# EAGLE board kingoftone_v1 (EAGLE 6.5.0)
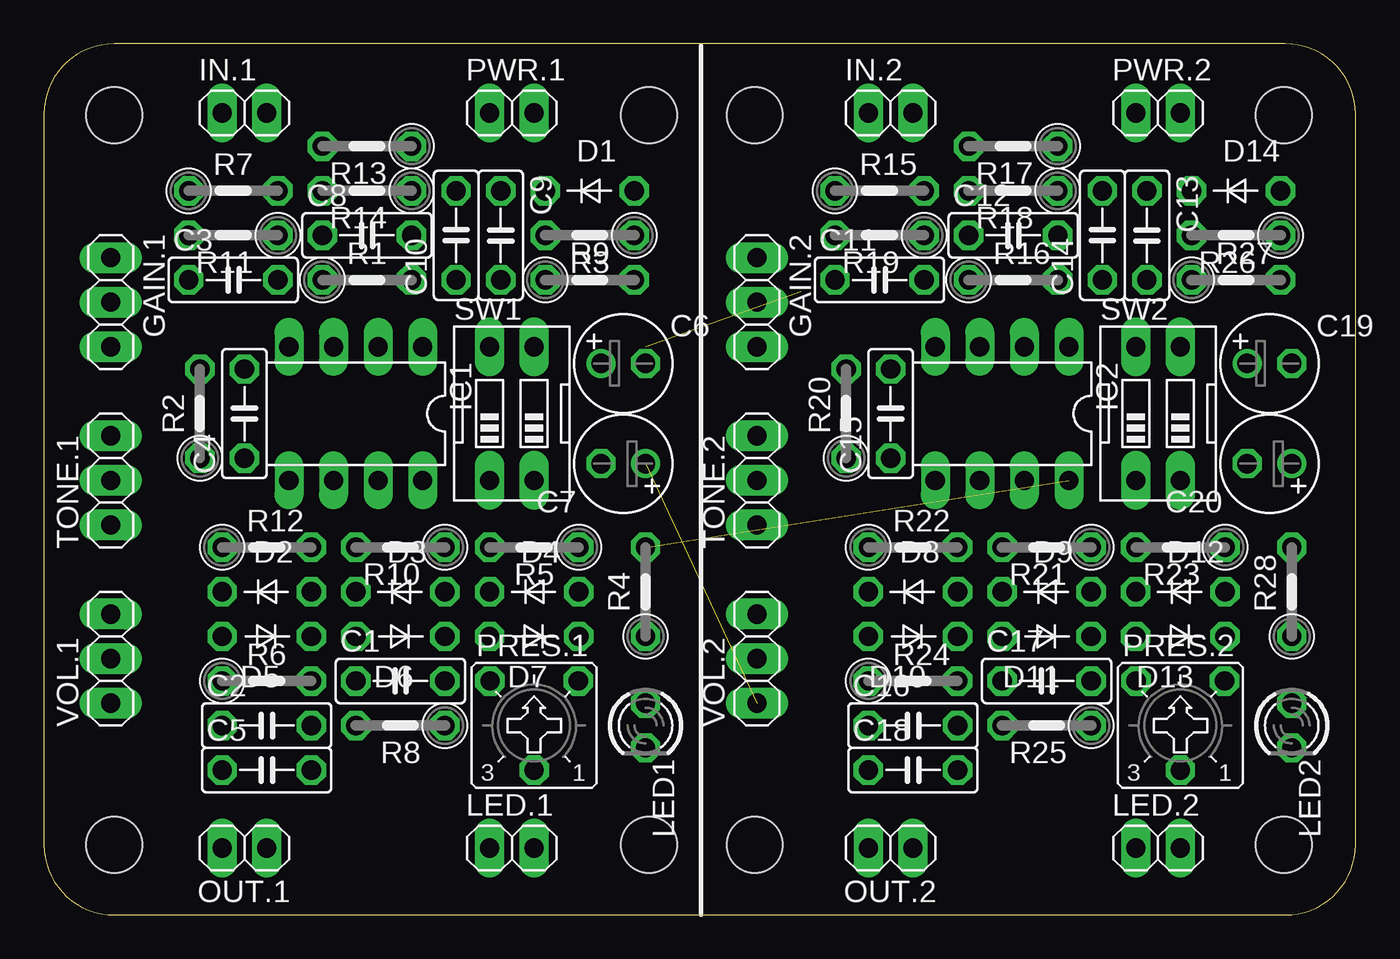
[diagram p0: board, top side]
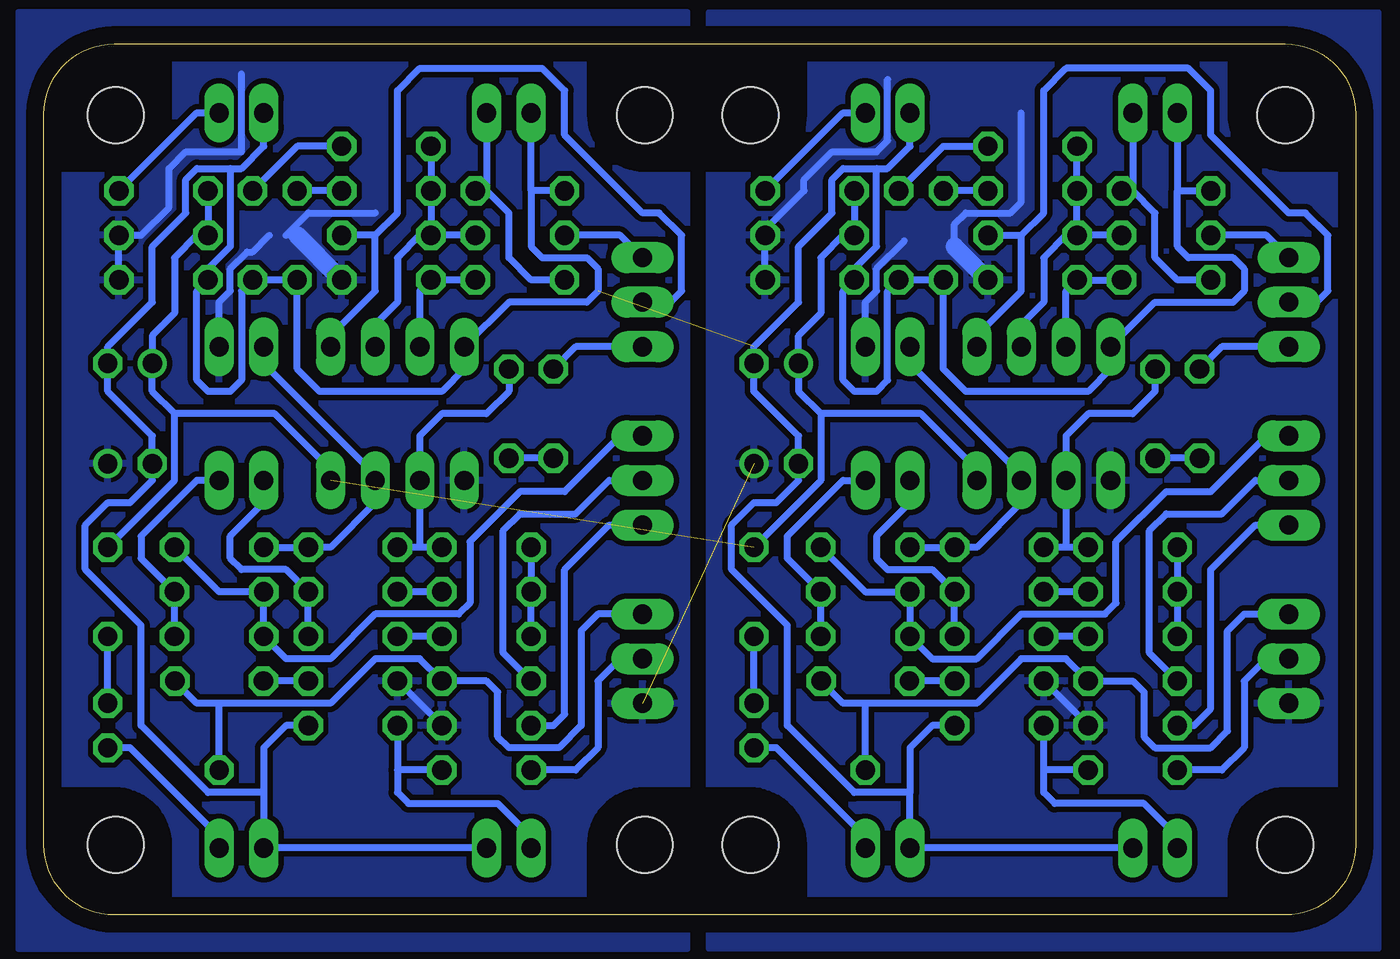
[diagram p1: board, bottom side, seen from below]

Size 74.76 x 49.65 mm. Coordinates in mm from the lower left corner, seen from the top.
Outline: 4,0 70.76,0 arc90 74.76,4 74.76,45.65 arc90 70.76,49.65 4,49.65 arc90 0,45.65 0,4 arc90 4,0
Copper layers (1*16): Top 0.035mm / dielectric 1.5mm / Bottom 0.035mm
Design rules "default": minimum track width 10mil, minimum drill 24mil, track to track 8mil, track to pad 8mil, pad to pad 8mil, via to via 8mil, smd to smd 8mil, copper to edge 40mil, drill to drill 8mil, minimum pad ring 10mil, minimum via ring 8mil, stop-mask expansion 4mil, vias tented up to drill 0mil, thermal gap 10mil
Holes 3.2 mm at 4,4 70.67,4 70.67,45.59 4,45.59 34.48,45.59 34.48,4 40.51,4 40.51,45.59
tKeepout: 8 lines
tRestrict: area 0,42.6 to 7,49.6; area 67.8,42.6 to 74.8,49.6; area 0,0 to 7,7; area 67.8,0 to 74.8,7; area 31.6,42.6 to 37,49.6; area 31.6,0 to 37.3,7; area 36.5,0 to 43.5,7; area 36.5,42.6 to 43.5,49.6
bRestrict: area 0,42.6 to 7,49.6; area 67.8,42.6 to 74.8,49.6; area 0,0 to 7,7; area 67.8,0 to 74.8,7; area 31.6,42.6 to 37,49.6; area 31.6,0 to 37.3,7; area 36.5,0 to 43.5,7; area 36.5,42.6 to 43.5,49.6
vRestrict: area 0,42.6 to 7,49.6; area 67.8,42.6 to 74.8,49.6; area 0,0 to 7,7; area 67.8,0 to 74.8,7; area 31.6,42.6 to 37,49.6; area 31.6,0 to 37.3,7; area 36.5,0 to 43.5,7; area 36.5,42.6 to 43.5,49.6

## Footprints (pad centres in the part's own frame; a part is rotated, then mirrored left to right if it is on the bottom)
C050-025X075 = drill 1.1 pad 1.676 octagon: 1 -2.54,0; 2 2.54,0
E2,5-6 = drill 1.1: + -1.27,0 | drill 1.1 pad 1.6 octagon: - 1.27,0
DO41-5 = drill 1.1 pad 1.676 octagon: A 2.54,0; C -2.54,0
1X03 = drill 1.1 pad 1.778 long: 1 -2.54,0; 2 0,0; 3 2.54,0
DIL08 = drill 1.1 long: 1 -3.81,-3.81; 2 -1.27,-3.81; 3 1.27,-3.81; 4 3.81,-3.81; 5 3.81,3.81; 6 1.27,3.81; 7 -1.27,3.81; 8 -3.81,3.81
1X02 = drill 1.1 pad 1.676 long: 1 -1.27,0; 2 1.27,0
LED3MM = drill 1.1 octagon: A -1.27,0; K 1.27,0
CT6 = drill 1.1 pad 1.676 octagon: A 2.515,2.54; E -2.515,2.54; S 0,-2.54
0207/5V = drill 1.1 pad 1.676 octagon: 1 -2.54,0; 2 2.54,0
EDG-02 = drill 1.1 pad 1.676 long: 1 -1.27,-3.81; 2 1.27,-3.81; 3 1.27,3.81; 4 -1.27,3.81

## Placement (x,y rotation side)
C1  10nF  [C050-025X075]  20.32,13.34 0 top
C2  10nF  [C050-025X075]  12.7,10.79 0 top
C3  10nF  [C050-025X075]  10.79,36.2 0 top
C4  100nF  [C050-025X075]  11.43,28.57 90 top
C5  1uF  [C050-025X075]  12.7,8.26 0 top
C6  100uF  [E2,5-6]  33.02,31.43 0 top
C7  100uF  [E2,5-6]  33.02,25.72 180 top
C8  100pF  [C050-025X075]  18.41,38.73 0 top
C9  10nF  [C050-025X075]  26.04,38.73 270 top
C10  10nF  [C050-025X075]  23.5,38.73 90 top
C11  10nF  [C050-025X075]  47.62,36.2 0 top
C12  100pF  [C050-025X075]  55.24,38.73 0 top
C13  10nF  [C050-025X075]  62.87,38.73 270 top
C14  10nF  [C050-025X075]  60.33,38.73 90 top
C15  100nF  [C050-025X075]  48.26,28.57 90 top
C16  10nF  [C050-025X075]  49.53,10.79 0 top
C17  10nF  [C050-025X075]  57.15,13.34 0 top
C18  1uF  [C050-025X075]  49.53,8.26 0 top
C19  100uF  [E2,5-6]  69.85,31.43 0 top
C20  100uF  [E2,5-6]  69.85,25.72 180 top
D1  1N5817  [DO41-5]  31.11,41.27 0 top
D2  MA856 (1N4148)  [DO41-5]  12.7,18.41 0 top
D3  MA856 (1N4148)  [DO41-5]  20.32,18.41 0 top
D4  1S1588 (1N4001)  [DO41-5]  27.94,18.41 0 top
D5  MA856 (1N4148)  [DO41-5]  12.7,15.88 180 top
D6  MA856 (1N4148)  [DO41-5]  20.32,15.88 180 top
D7  1S1588 (1N4001)  [DO41-5]  27.94,15.88 180 top
D8  MA856 (1N4148)  [DO41-5]  49.53,18.41 0 top
D9  MA856 (1N4148)  [DO41-5]  57.15,18.41 0 top
D10  MA856 (1N4148)  [DO41-5]  49.53,15.88 180 top
D11  MA856 (1N4148)  [DO41-5]  57.15,15.88 180 top
D12  1S1588 (1N4001)  [DO41-5]  64.77,18.41 0 top
D13  1S1588 (1N4001)  [DO41-5]  64.77,15.88 180 top
D14  1N5817  [DO41-5]  67.94,41.27 0 top
GAIN.1  100kB  [1X03]  3.81,34.93 270 top
GAIN.2  100kB  [1X03]  40.64,34.93 270 top
IC1  NE5535P  [DIL08]  17.78,28.57 180 top
IC2  NE5535P  [DIL08]  54.61,28.57 180 top
IN.1  [1X02]  11.43,45.72 0 top
IN.2  [1X02]  48.26,45.72 0 top
LED1  [LED3MM]  34.29,10.79 270 top
LED2  [LED3MM]  71.12,10.79 270 top
LED.1  [1X02]  26.67,3.81 0 top
LED.2  [1X02]  63.5,3.81 0 top
OUT.1  [1X02]  11.43,3.81 180 top
OUT.2  [1X02]  48.26,3.81 180 top
PRES.1  50k  [CT6]  27.94,10.79 0 top
PRES.2  50k  [CT6]  64.77,10.79 0 top
PWR.1  [1X02]  26.67,45.72 0 top
PWR.2  [1X02]  63.5,45.72 0 top
R1  1M  [0207/5V]  18.41,36.2 0 top
R2  10k  [0207/5V]  8.89,28.57 90 top
R3  47k  [0207/5V]  31.11,38.73 180 top
R4  1k  [0207/5V]  34.29,18.41 90 top
R5  1k  [0207/5V]  27.94,20.95 180 top
R6  6k8  [0207/5V]  12.7,13.34 0 top
R7  1M  [0207/5V]  10.79,41.27 0 top
R8  1M  [0207/5V]  20.32,10.79 180 top
R9  47k  [0207/5V]  31.11,36.2 0 top
R10  220k  [0207/5V]  20.32,20.95 180 top
R11  10k  [0207/5V]  10.79,38.73 180 top
R12  6k8  [0207/5V]  12.7,20.95 0 top
R13  27k  [0207/5V]  18.41,43.82 180 top
R14  33k  [0207/5V]  18.41,41.27 180 top
R15  1M  [0207/5V]  47.62,41.27 0 top
R16  1M  [0207/5V]  55.24,36.2 0 top
R17  27k  [0207/5V]  55.24,43.82 180 top
R18  33k  [0207/5V]  55.24,41.27 180 top
R19  10k  [0207/5V]  47.62,38.73 180 top
R20  10k  [0207/5V]  45.72,28.57 90 top
R21  220k  [0207/5V]  57.15,20.95 180 top
R22  6k8  [0207/5V]  49.53,20.95 0 top
R23  1k  [0207/5V]  64.77,20.95 180 top
R24  6k8  [0207/5V]  49.53,13.34 0 top
R25  1M  [0207/5V]  57.15,10.79 180 top
R26  47k  [0207/5V]  67.94,38.73 180 top
R27  47k  [0207/5V]  67.94,36.2 0 top
R28  1k  [0207/5V]  71.12,18.41 90 top
SW1  [EDG-02]  26.67,28.57 0 top
SW2  [EDG-02]  63.5,28.57 0 top
TONE.1  25kB  [1X03]  3.81,24.76 90 top
TONE.2  25kB  [1X03]  40.64,24.76 90 top
VOL.1  100kA  [1X03]  3.81,14.61 90 top
VOL.2  100kA  [1X03]  40.64,14.61 90 top

## Library data of the parts
C1-C20 D1-D14 GAIN.1 GAIN.2 IC1 IC2 IN.1 IN.2 LED1 LED2 LED.1 LED.2 OUT.1 OUT.2 PRES.1 PRES.2 PWR.1 PWR.2 R1-R28 SW1 SW2 TONE.1 TONE.2 VOL.1 VOL.2 = kingoftone

## Nets
+4.5V: C1.1 C2.2 C7.+ C16.2 C17.1 C20.+ IC1.5 IC2.5 R1.2 R3.1 R9.2 R16.2 R26.1 R27.2 SW1.3 SW2.3 VOL.1.1 VOL.2.1
+9V: C6.+ C19.+ D1.C D14.C IC1.8 IC2.8 R3.2 R4.2 R26.2 R28.2
GND: C6.- C7.- C9.2 C10.1 C13.2 C14.1 C19.- C20.- IC1.4 IC2.4 IN.1.1 IN.2.1 LED.1.1 LED.2.1 OUT.1.1 OUT.2.1 PWR.1.1 PWR.2.1 R7.1 R8.1 R9.1 R15.1 R25.1 R27.1
N$1: C3.1 IN.1.2 R7.2
N$2: C3.2 IC1.3 R1.1
N$3: C8.1 IC1.2 R11.1 R13.2 R14.2
N$4: C8.2 GAIN.1.2 IC1.1
N$5: C9.1 R13.1
N$6: C10.2 R14.1
N$7: GAIN.1.1 R11.2
N$8: C4.1 R2.1
N$9: GAIN.1.3 R2.2
N$10: C4.2 IC1.6 R10.2 R12.2
N$11: IC1.7 R5.2 R10.1 SW1.4
N$12: D2.A D3.C
N$13: D2.C D5.A R12.1
N$14: D5.C D6.A
N$15: D3.A D6.C SW1.1
N$16: D4.C D7.A R5.1 TONE.1.3
N$17: D4.A D7.C SW1.2
N$18: C5.1 VOL.1.2
N$19: R6.1 TONE.1.2
N$20: C2.1 TONE.1.1
N$21: C1.2 PRES.1.E
N$22: PRES.1.A PRES.1.S R6.2 VOL.1.3
N$23: C5.2 OUT.1.2 R8.2
N$24: D1.A PWR.1.2
N$25: LED1.A R4.1
N$26: LED1.K LED.1.2
N$27: C11.1 IN.2.2 R15.2
N$28: C11.2 IC2.3 R16.1
N$29: C12.1 IC2.2 R17.2 R18.2 R19.1
N$30: C12.2 GAIN.2.2 IC2.1
N$31: C13.1 R17.1
N$32: C14.2 R18.1
N$33: GAIN.2.1 R19.2
N$34: C15.1 R20.1
N$35: GAIN.2.3 R20.2
N$36: C15.2 IC2.6 R21.2 R22.2
N$37: IC2.7 R21.1 R23.2 SW2.4
N$38: D8.A D9.C
N$39: D8.C D10.A R22.1
N$40: D10.C D11.A
N$41: D9.A D11.C SW2.1
N$42: D12.A D13.C SW2.2
N$43: R24.1 TONE.2.2
N$44: C16.1 TONE.2.1
N$45: C17.2 PRES.2.E
N$46: PRES.2.A PRES.2.S R24.2 VOL.2.3
N$47: D12.C D13.A R23.1 TONE.2.3
N$48: C18.1 VOL.2.2
N$49: C18.2 OUT.2.2 R25.2
N$50: D14.A PWR.2.2
N$51: LED2.A R28.1
N$52: LED2.K LED.2.2

## Tracks (layer width: path | path; a pad name or v marks a point on that pad's centre or on a via)
+4.5V  (1 unrouted)
  Bottom 0.406: 22.86,38.1 22.86,39.37 22.23,40.01 19.68,40.01 19.05,40.64 19.05,45.72 | C2.2 C1.1 | SW1.3 27.94,34.93 27.3,35.56 27.3,36.83 25.72,38.42 | R9.2 R3.1 33.66,39.05 31.43,41.27 31.43,41.91 29.84,43.5 27.3,43.5 26.67,44.13 26.67,47.62 | C16.2 C17.1 | 60.33,38.73 60.96,38.73 59.69,40.01 55.88,40.01 | SW2.3 64.77,34.93 64.14,35.56 64.14,36.83 63.18,37.78 62.87,37.78 61.91,38.73 | R27.2 R26.1 69.22,38.73 67.63,40.32 67.63,42.55 66.67,43.5 63.5,43.5 63.5,47.94
  Bottom 1.016: R1.2 22.86,38.1 | R16.2 60.33,38.73
  pour Bottom (isolate 0.305): -1.27,51.44 -1.27,-1.91 36.83,-1.91 36.83,51.44
  pour Bottom (isolate 0.305): 38.1,-1.91 38.1,51.44 76.2,51.44 76.2,-1.91
+9V  (1 unrouted)
  Bottom 0.406: D1.C R3.2 29.21,38.73 30.48,37.47 30.48,34.29 31.75,33.02 C6.+ 31.75,29.84 30.48,28.57 | 30.48,28.57 30.48,24.76 R4.2 | IC1.8 21.59,25.4 24.77,28.57 30.48,28.57 | D14.C R26.2 66.04,38.73 67.31,37.47 67.31,34.29 68.58,33.02 C19.+ 68.58,29.84 67.31,28.57 | IC2.8 58.42,25.4 61.59,28.57 67.31,28.57 | R28.2 67.31,24.76 67.31,28.57
GND  (1 unrouted)
  Bottom 0.406: OUT.1.1 LED.1.1 25.4,6.99 | R8.1 24.13,10.79 25.4,9.53 25.4,6.99 | 10.16,41.27 10.16,38.1 9.53,37.47 6.99,37.47 6.35,36.83 6.35,35.56 6.99,34.93 11.43,34.93 IC1.4 13.97,31.11 15.24,29.84 22.23,29.84 23.5,31.11 C10.1 C9.2 26.67,35.56 26.67,30.48 27.3,29.84 28.57,29.84 29.21,30.48 29.21,35.56 R9.1 28.57,36.83 27.3,38.1 27.3,42.55 | 10.16,41.27 R7.1 | IN.1.1 10.16,41.27 | 27.3,42.55 29.21,42.55 29.84,41.91 29.84,40.01 31.75,38.1 31.75,34.93 34.29,32.39 C6.- 34.29,29.84 31.75,27.3 C7.- 31.75,24.76 33.02,23.49 34.29,23.49 35.56,22.22 35.56,19.68 32.38,16.51 32.38,10.79 28.57,6.99 25.4,6.99 | 27.3,42.55 26.67,42.55 25.4,43.82 PWR.1.1 | OUT.2.1 LED.2.1 62.23,6.99 | R25.1 60.96,10.79 62.23,9.53 62.23,6.99 | 62.23,6.99 65.41,6.99 69.22,10.79 69.22,16.51 72.39,19.68 72.39,22.22 71.12,23.49 69.85,23.49 68.58,24.76 C20.- 68.58,27.3 71.12,29.84 C19.- 71.12,32.39 68.58,34.93 68.58,38.1 66.67,40.01 66.67,41.91 66.04,42.55 64.14,42.55 | 64.14,42.55 63.5,42.55 62.23,43.82 PWR.2.1 | 46.99,41.27 IN.2.1 | R15.1 46.99,41.27 | 46.99,41.27 46.99,38.1 46.35,37.47 43.81,37.47 43.18,36.83 43.18,35.56 43.81,34.93 48.26,34.93 IC2.4 50.8,31.11 52.07,29.84 59.05,29.84 60.33,31.11 C14.1 C13.2 63.5,35.56 63.5,30.48 64.14,29.84 65.41,29.84 66.04,30.48 66.04,35.56 R27.1 65.41,36.83 64.14,38.1 64.14,42.55
N$1
  Bottom 0.406: C3.1 10.16,36.2 11.43,37.47 11.43,40.01 12.7,41.27 | IN.1.2 12.7,41.27 | 12.7,41.27 R7.2
N$2
  Bottom 0.406: C3.2 R1.1 16.51,35.56 IC1.3
N$3
  Bottom 0.406: C8.1 R14.2 R13.2 | R11.1 C8.1 | C8.1 16.51,38.73 17.78,37.47 17.78,34.93 19.05,33.66 IC1.2
N$4
  Bottom 0.406: GAIN.1.2 2.22,34.93 1.59,35.56 1.59,38.73 2.86,40.01 3.81,40.01 8.26,44.45 8.26,46.99 9.53,48.26 16.51,48.26 17.78,46.99 17.78,40.01 19.05,38.73 | IC1.1 21.59,33.02 19.05,35.56 19.05,38.73 | C8.2 19.05,38.73
N$5
  Bottom 0.406: C9.1 23.5,43.82 R13.1
N$6
  Bottom 0.406: R14.1 C10.2
N$7
  Bottom 0.406: GAIN.1.1 5.08,38.73 R11.2
N$8
  Bottom 0.406: R2.1 C4.1
N$9
  Bottom 0.406: GAIN.1.3 7.62,32.39 R2.2
N$10
  Bottom 0.406: C4.2 11.43,29.84 12.7,28.57 15.24,28.57 16.51,27.3 IC1.6 16.51,20.95 | R12.2 16.51,20.95 | 16.51,20.95 R10.2
N$11
  Bottom 0.406: R5.2 R10.1 21.59,20.95 19.05,23.49 IC1.7 19.05,25.08 25.4,31.43 SW1.4
N$12
  Bottom 0.406: D2.A D3.C
N$13
  Bottom 0.406: R12.1 D2.C D5.A
N$14
  Bottom 0.406: D5.C D6.A
N$15
  Bottom 0.406: D6.C D3.A 24.13,19.68 26.67,19.68 27.3,20.32 27.3,21.59 25.4,23.49 SW1.1
N$16
  Bottom 0.406: R5.1 27.94,18.41 D4.C D7.A 24.13,14.61 21.59,14.61 19.05,17.14 14.29,17.14 13.65,17.78 13.65,21.27 10.79,24.13 8.26,24.13 5.08,27.3 TONE.1.3
N$17
  Bottom 0.406: D7.C D4.A 32.38,20.32 32.38,21.59 29.21,24.76 SW1.2
N$18
  Bottom 0.406: VOL.1.2 5.08,14.61 6.35,13.34 6.35,9.53 7.62,8.26 C5.1
N$19
  Bottom 0.406: R6.1 11.75,14.92 11.75,21.91 10.79,22.86 7.62,22.86 5.71,24.76 TONE.1.2
N$20
  Bottom 0.406: C2.1 9.21,10.79 8.26,11.75 8.26,19.68 5.71,22.22 TONE.1.1
N$21
  Bottom 0.406: C1.2 PRES.1.E
N$22
  Bottom 0.406: 27.94,12.06 21.59,12.06 19.05,14.61 16.51,14.61 R6.2 12.7,13.34 12.06,12.7 12.06,10.16 11.43,9.53 8.26,9.53 7.3,10.48 7.3,16.19 6.35,17.14 VOL.1.3 | PRES.1.S 27.94,12.06 | 27.94,12.06 29.21,12.06 30.45,13.31 PRES.1.A
N$23
  Bottom 0.406: C5.2 17.78,8.26 | 17.78,8.26 R8.2 | OUT.1.2 10.16,4.45 12.06,6.35 17.14,6.35 17.78,6.99 17.78,8.26
N$24
  Bottom 0.406: D1.A 29.21,45.72 PWR.1.2
N$25
  Bottom 0.406: LED1.A R4.1
N$26
  Bottom 0.406: LED.1.2 27.94,4.45 33.02,9.53 LED1.K
N$27
  Bottom 0.406: C11.1 46.99,36.2 48.26,37.47 48.26,40.01 49.53,41.27 | 49.53,41.27 R15.2 | IN.2.2 49.53,41.27
N$28
  Bottom 0.406: C11.2 R16.1 53.34,35.56 IC2.3
N$29
  Bottom 0.406: R17.2 R18.2 C12.1 | R19.1 C12.1 | C12.1 53.34,38.73 54.61,37.47 54.61,34.93 55.88,33.66 IC2.2
N$30
  Bottom 0.406: IC2.1 58.42,33.02 55.88,35.56 55.88,38.73 | 55.88,38.73 C12.2 | 55.88,38.73 54.61,40.01 54.61,46.99 53.34,48.26 46.35,48.26 45.09,46.99 45.09,44.45 40.64,40.01 39.69,40.01 38.42,38.73 38.42,35.56 39.05,34.93 GAIN.2.2
N$31
  Bottom 0.406: R17.1 60.33,43.82 C13.1
N$32
  Bottom 0.406: R18.1 C14.2
N$33
  Bottom 0.406: GAIN.2.1 41.91,38.73 R19.2
N$34
  Bottom 0.406: R20.1 C15.1
N$35
  Bottom 0.406: GAIN.2.3 44.45,32.39 R20.2
N$36
  Bottom 0.406: R22.2 53.34,20.95 | 53.34,20.95 R21.2 | 53.34,20.95 IC2.6 53.34,27.3 52.07,28.57 49.53,28.57 48.26,29.84 C15.2
N$37
  Bottom 0.406: R23.2 R21.1 58.42,20.95 55.88,23.49 IC2.7 55.88,25.08 62.23,31.43 SW2.4
N$38
  Bottom 0.406: D8.A D9.C
N$39
  Bottom 0.406: R22.1 D8.C D10.A
N$40
  Bottom 0.406: D10.C D11.A
N$41
  Bottom 0.406: D11.C D9.A 60.96,19.68 63.5,19.68 64.14,20.32 64.14,21.59 62.23,23.49 SW2.1
N$42
  Bottom 0.406: D13.C D12.A 69.22,20.32 69.22,21.59 66.04,24.76 SW2.2
N$43
  Bottom 0.406: R24.1 48.58,14.92 48.58,21.91 47.62,22.86 44.45,22.86 42.55,24.76 TONE.2.2
N$44
  Bottom 0.406: C16.1 45.72,10.79 45.09,11.43 45.09,19.68 42.55,22.22 TONE.2.1
N$45
  Bottom 0.406: C17.2 PRES.2.E
N$46
  Bottom 0.406: VOL.2.3 43.18,17.14 44.13,16.19 44.13,10.79 45.4,9.53 48.26,9.53 48.9,10.16 48.9,12.7 49.53,13.34 R24.2 53.34,14.61 55.88,14.61 58.42,12.06 64.77,12.06 | 64.77,12.06 66.04,12.06 67.28,13.31 PRES.2.A | PRES.2.S 64.77,12.06
N$47
  Bottom 0.406: R23.1 64.77,18.41 D12.C D13.A 60.96,14.61 58.42,14.61 55.88,17.14 51.12,17.14 50.48,17.78 50.48,21.27 47.62,24.13 45.09,24.13 41.91,27.3 TONE.2.3
N$48
  Bottom 0.406: VOL.2.2 41.91,14.61 43.18,13.34 43.18,9.53 44.45,8.26 C18.1
N$49
  Bottom 0.406: R25.2 54.61,8.26 | 54.61,8.26 54.61,6.99 53.98,6.35 48.9,6.35 46.99,4.45 OUT.2.2 | C18.2 54.61,8.26
N$50
  Bottom 0.406: D14.A 66.04,45.72 PWR.2.2
N$51
  Bottom 0.406: LED2.A R28.1
N$52
  Bottom 0.406: LED.2.2 64.77,4.45 69.85,9.53 LED2.K